# EAGLE board untitled (EAGLE 6.1)
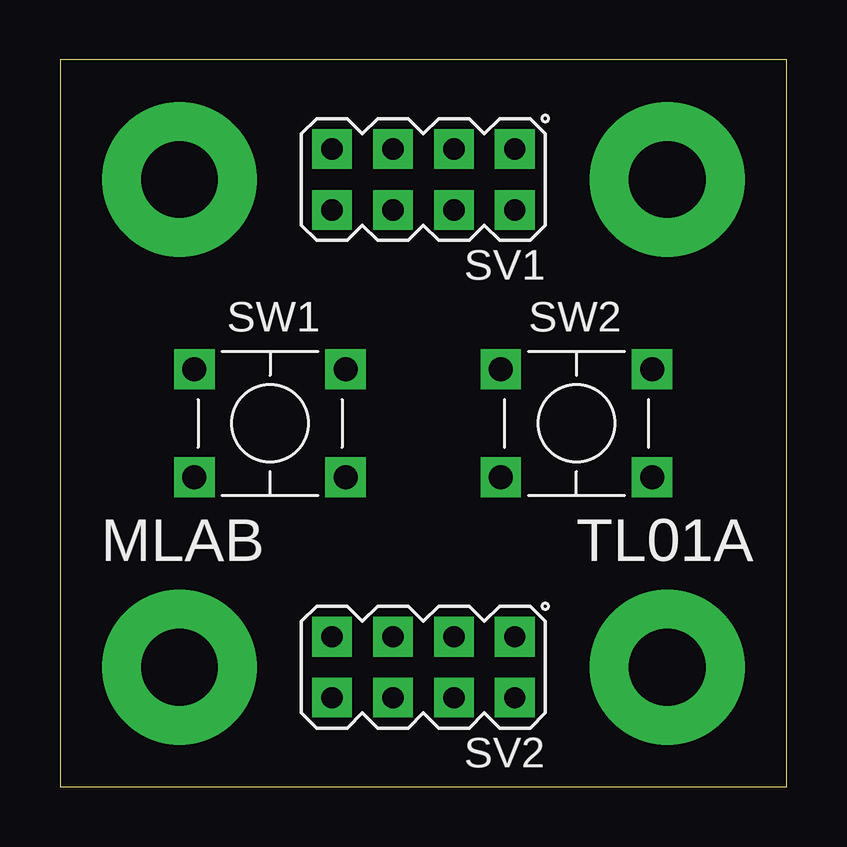
[diagram p0: board, top side]
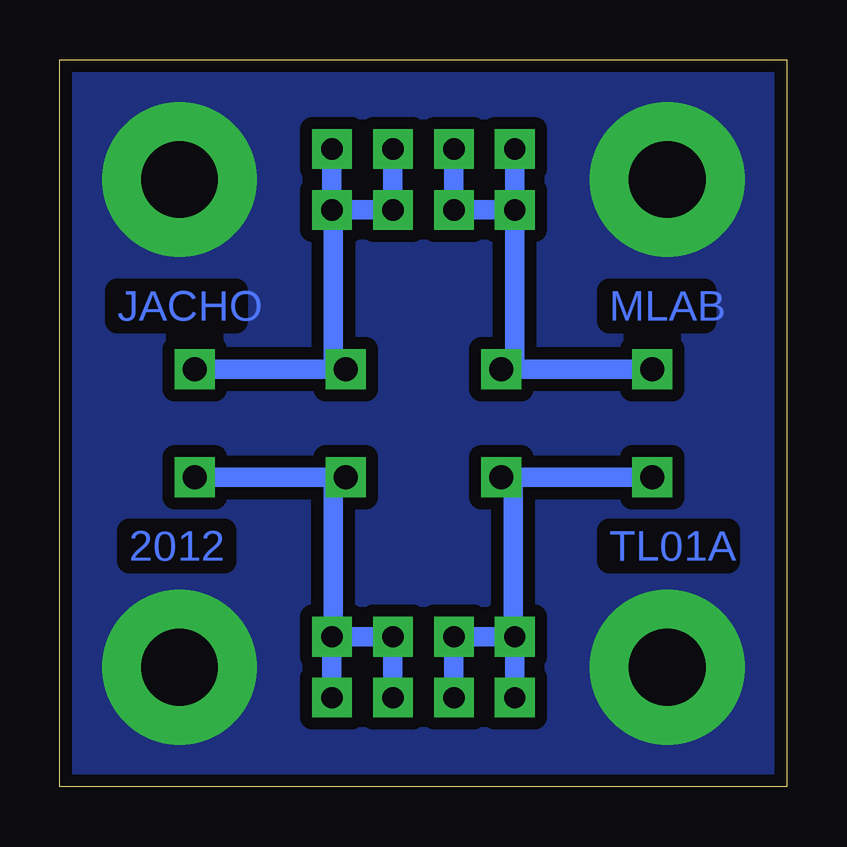
[diagram p1: board, bottom side, seen from below]

Size 30.28 x 30.28 mm. Coordinates in mm from the lower left corner, seen from the top.
Outline: 0,0 30.28,0 30.28,30.28 0,30.28 0,0
Copper layers (1*16): Top 0.035mm / dielectric 1mm / Bottom 0.035mm
Design rules: minimum track width 12mil, minimum drill 24mil, track to track 20mil, track to pad 20mil, pad to pad 20mil, via to via 20mil, smd to smd 8mil, copper to edge 20mil, drill to drill 70mil, minimum pad ring 10mil, minimum via ring 8mil, stop-mask expansion 5mil, vias tented up to drill 0mil, thermal gap 0mil

## Footprints (pad centres in the part's own frame; a part is rotated, then mirrored left to right if it is on the bottom)
MA04-2 = drill 0.889 pad 1.651 square: 1 -3.81,-1.27; 2 -3.81,1.27; 3 -1.27,-1.27; 4 -1.27,1.27; 5 1.27,-1.27; 6 1.27,1.27; 7 3.81,-1.27; 8 3.81,1.27
TACT-64K = drill 1 pad 1.676 square: P$1 -3.15,2.25; P$2 3.15,2.25; P$3 -3.15,-2.25; P$4 3.15,-2.25
SROUB3M = drill 3.2 pad 6.452: P$1 0,0

## Placement (x,y rotation side)
SV1  [MA04-2]  15.14,25.3 180 top
SV2  [MA04-2]  15.14,4.98 180 top
SW1  [TACT-64K]  8.75,15.14 0 top
SW2  [TACT-64K]  21.52,15.14 0 top
X1  SROUB3M  [SROUB3M]  4.98,4.98 0 top
X2  SROUB3M  [SROUB3M]  4.98,25.3 0 top
X3  SROUB3M  [SROUB3M]  25.3,4.98 0 top
X4  SROUB3M  [SROUB3M]  25.3,25.3 0 top

## Library data of the parts
SV1 SV2 = moje_hrebinky; OC_FARNELL: unknown; OC_NEWARK: unknown
SW1 SW2 = moje_tlacitka
X1-X4 = moje

## Nets
GND: X1.P$1 X2.P$1 X3.P$1 X4.P$1
N$1: SV1.5 SV1.6 SV1.7 SV1.8 SW1.P$1 SW1.P$2
N$2: SV2.5 SV2.6 SV2.7 SV2.8 SW1.P$3 SW1.P$4
N$3: SV1.1 SV1.2 SV1.3 SV1.4 SW2.P$1 SW2.P$2
N$4: SV2.1 SV2.2 SV2.3 SV2.4 SW2.P$3 SW2.P$4

## Tracks (layer width: path | path; a pad name or v marks a point on that pad's centre or on a via)
GND
  pour Bottom: -0.1,30.4 30.4,30.4 30.4,-0.1 -0.1,-0.1
N$1
  Bottom 0.813: SW1.P$1 SW1.P$2 11.33,17.39 SV1.8 | SV1.8 SV1.6 SV1.5 | SV1.7 SV1.8
N$2
  Bottom 0.61: SV2.7 11.4,6.25
  Bottom 0.813: SV2.8 SV2.7 SV2.5 SV2.6 | SW1.P$4 11.4,12.89 | 11.4,12.89 SW1.P$3 | 11.4,6.25 11.4,12.89
N$3
  Bottom 0.61: SV1.2 18.9,24.03
  Bottom 0.813: SW2.P$1 18.9,17.39 | 18.9,17.39 SW2.P$2 | SV1.3 SV1.4 SV1.2 SV1.1 | 18.9,24.03 18.9,17.39
N$4
  Bottom 0.61: SV2.1 18.9,6.25
  Bottom 0.813: SV2.4 SV2.3 SV2.1 SV2.2 | SW2.P$4 18.9,12.89 | 18.9,12.89 SW2.P$3 | 18.9,6.25 18.9,12.89

## Text on the board
Bottom: MLAB | JACHO | TL01A | 2012
tPlace: MLAB | TL01A